# EAGLE board Verteilerplatine_Universal_LoetJumper_3x_Ohne_Trennung (EAGLE 9.2.2)
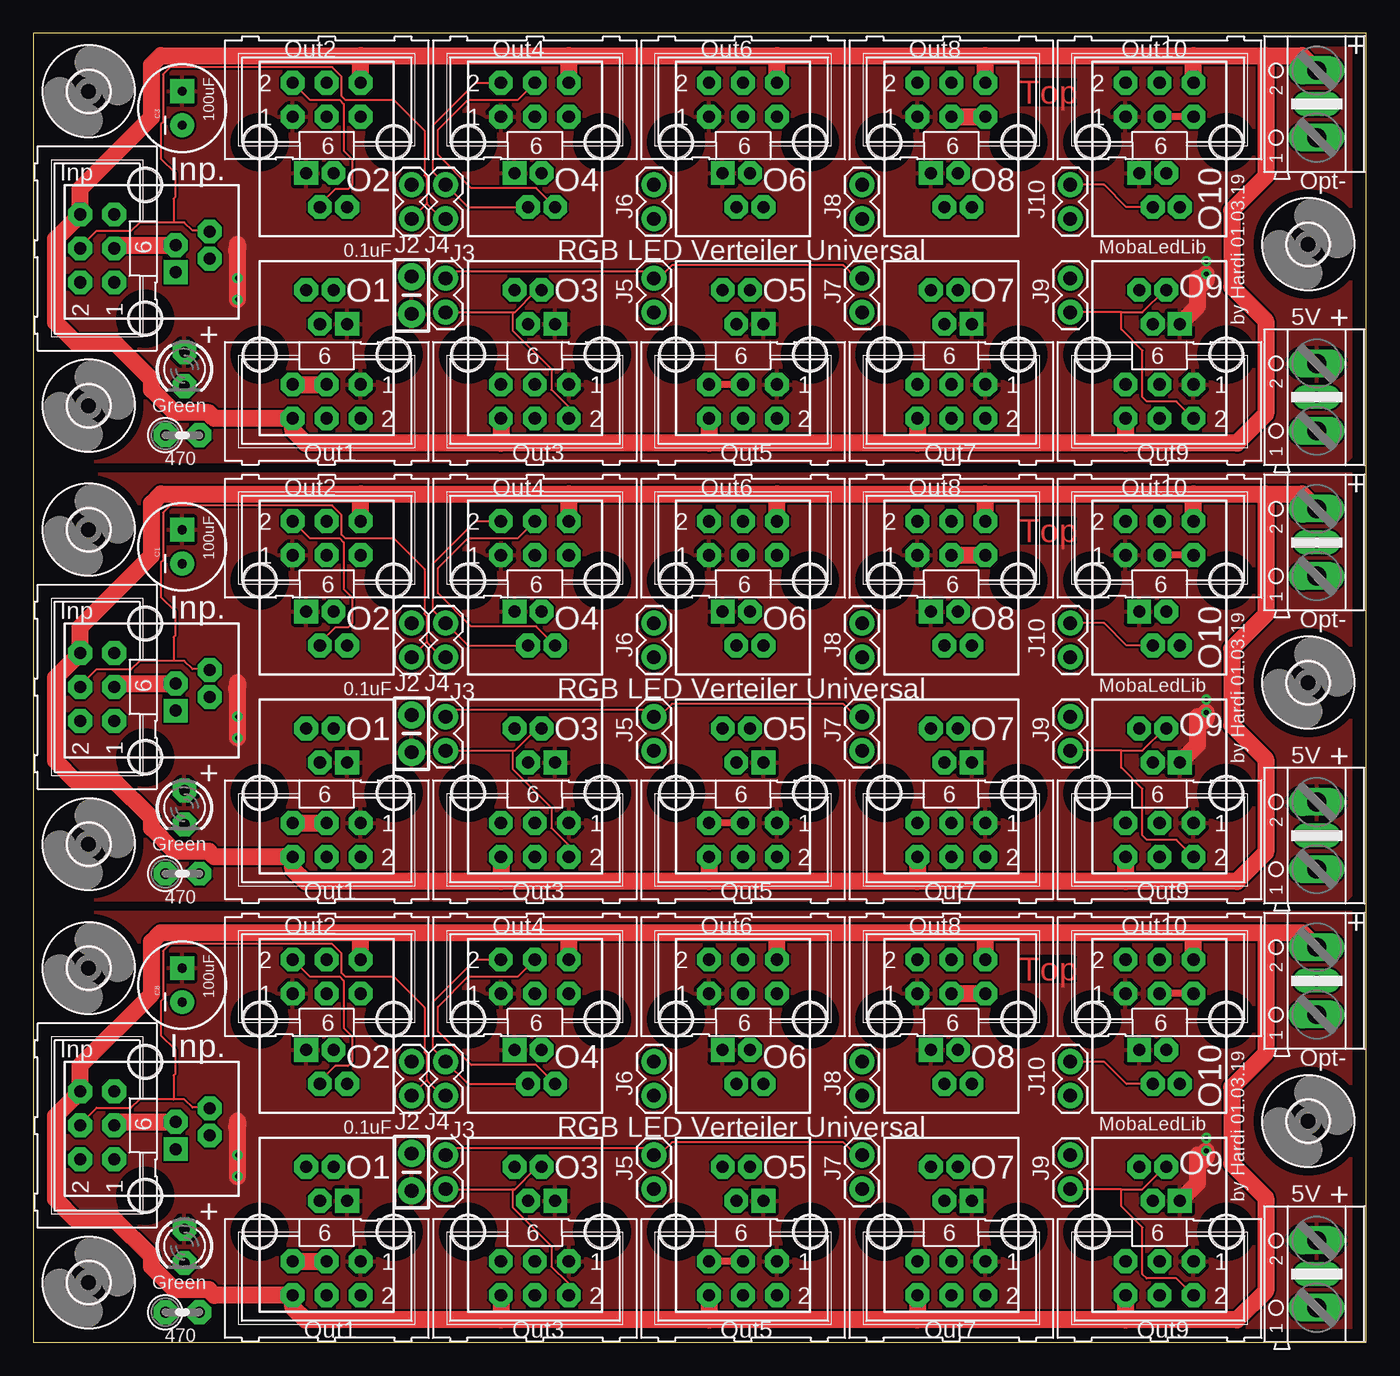
[diagram p0: board, top side]
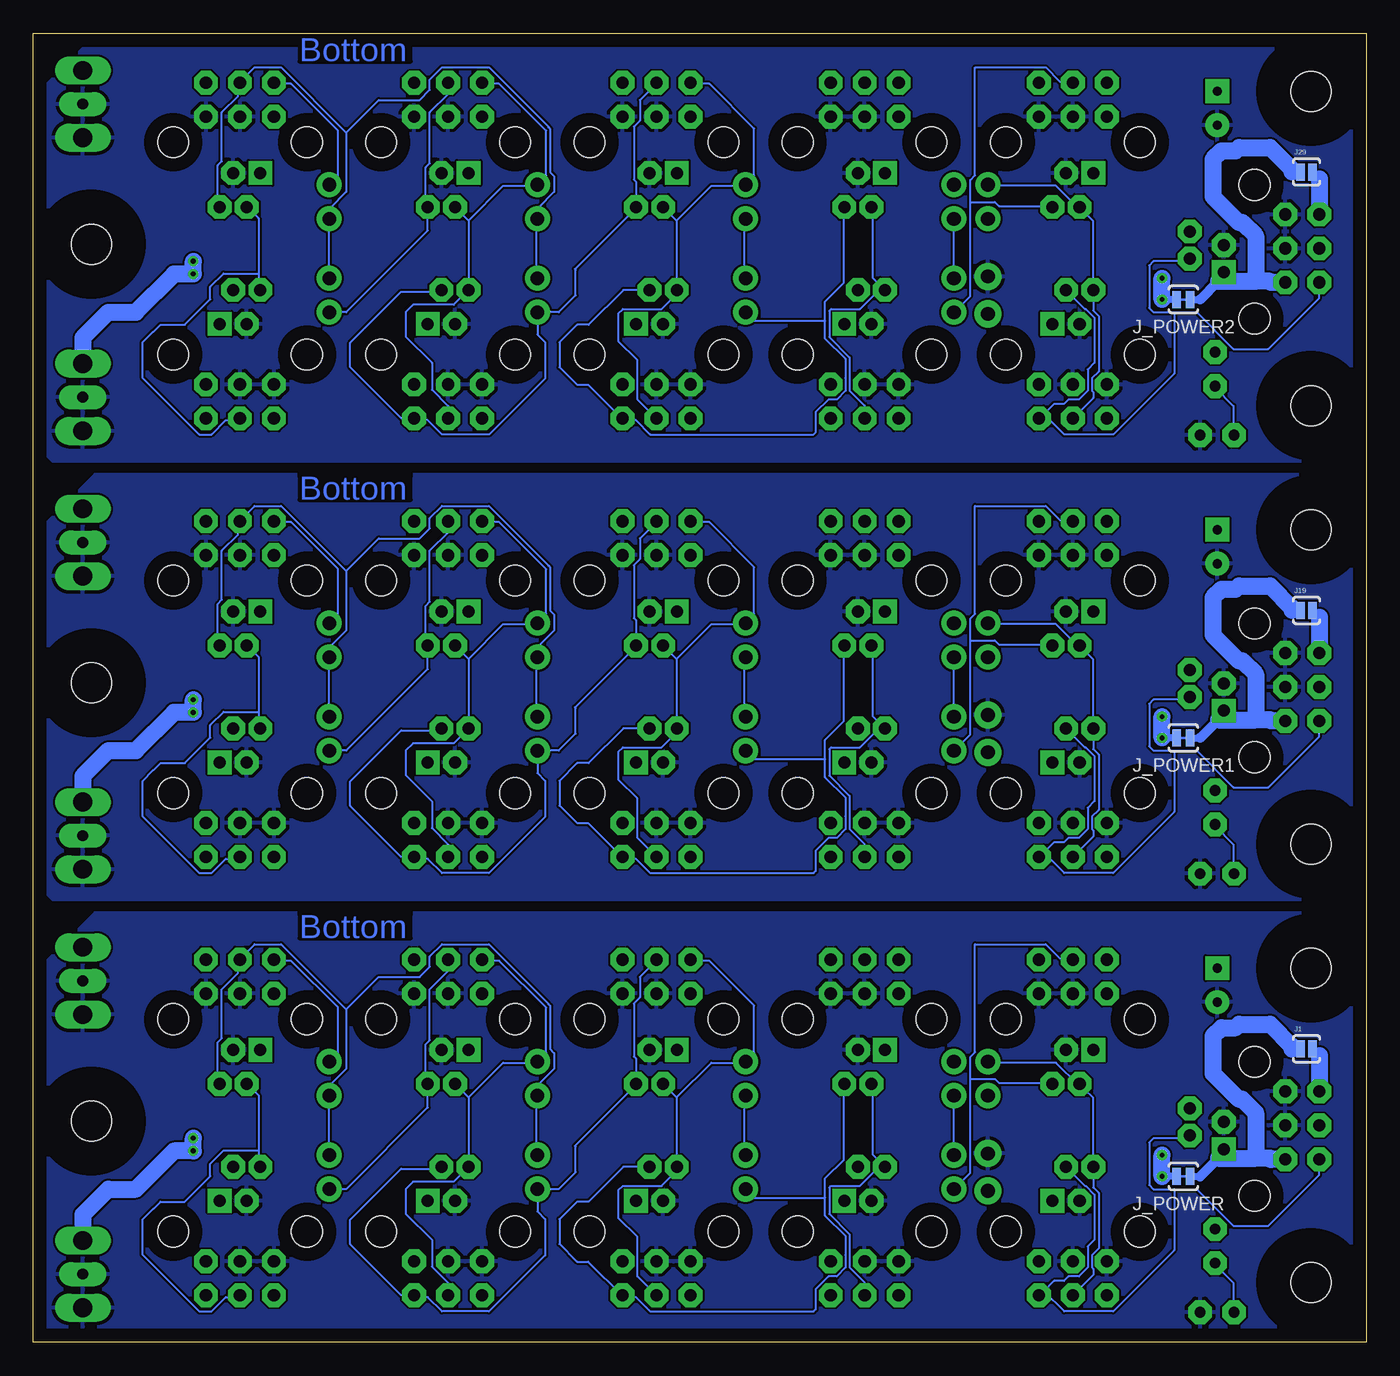
[diagram p1: board, bottom side, seen from below]

Size 99.57 x 97.78 mm. Coordinates in mm from the lower left corner, seen from the top.
Outline: 0,0 99.57,0 99.57,32.76 99.57,97.78 0,97.78 0,0
Copper layers (1*16): Top 0.035mm / dielectric 1.5mm / Bottom 0.035mm
Design rules "default": minimum track width 6mil, minimum drill 0.35mm, track to track 6mil, track to pad 6mil, pad to pad 6mil, via to via 6mil, smd to smd 6mil, copper to edge 40mil, drill to drill 6mil, minimum pad ring 10mil, minimum via ring 8mil, stop-mask expansion 4mil, vias tented up to drill 0mil, thermal gap 10mil

## Footprints (pad centres in the part's own frame; a part is rotated, then mirrored left to right if it is on the bottom)
SPARKFUN-CAPACITORS_CPOL-RADIAL-100UF-25V = drill 0.7 pad 1.778 square: 1 1.27,0 | drill 0.7 pad 1.778: 2 -1.27,0
CAP-PTH-SMALL-KIT = drill 1.016 pad 2.032: 1 -1.397,0; 2 1.397,0
3,0 = hole 3: 0,0
ML6 = drill 0.914 pad 1.778 octagon: 1 -2.54,-1.27; 2 -2.54,1.27; 3 0,-1.27; 4 0,1.27; 5 2.54,-1.27; 6 2.54,1.27
RJ10 = drill 0.9 pad 1.778 square: 1 -1.524,-2.3 | drill 0.9 pad 1.778 octagon: 2 -0.508,-4.84; 3 0.508,-2.3; 4 1.524,-4.84 | hole 2.3: 5,0; -5,0
SJ_2S-NO = smd 0.635 x 1.27: 1 -0.45,0; 2 0.45,0
1X02 = drill 1.016 pad 1.88: 1 0,0; 2 2.54,0
SJ_2S-TRACE = smd 0.635 x 1.27: 1 -0.508,0; 2 0.508,0
LED_LED3MM = drill 0.813 pad 1.778 octagon: A -1.27,0; K 1.27,0
RCL_0207/2V = drill 0.813 pad 1.778 octagon: 1 -1.27,0; 2 1.27,0
AK500/2+M = drill 1.397 long: 1 -2.515,0; 2 2.515,0 | drill 0.813 pad 1.778 long: M 0,0

## Placement (x,y rotation side)
C1  100uF  [SPARKFUN-CAPACITORS_CPOL-RADIAL-100UF-25V]  11.11,59.43 90 top
C2  0.1uF  [CAP-PTH-SMALL-KIT]  28.26,45.46 270 top
C3  100uF  [SPARKFUN-CAPACITORS_CPOL-RADIAL-100UF-25V]  11.11,92.19 90 top
C4  0.1uF  [CAP-PTH-SMALL-KIT]  28.26,78.22 270 top
C8  100uF  [SPARKFUN-CAPACITORS_CPOL-RADIAL-100UF-25V]  11.11,26.67 90 top
C9  0.1uF  [CAP-PTH-SMALL-KIT]  28.26,12.7 270 top
H1  MOUNT-HOLE3.0  [3,0]  4.13,60.7 0 top
H2  MOUNT-HOLE3.0  [3,0]  4.13,37.21 0 top
H3  MOUNT-HOLE3.0  [3,0]  95.25,49.27 0 top
H4  MOUNT-HOLE3.0  [3,0]  4.13,93.46 0 top
H5  MOUNT-HOLE3.0  [3,0]  4.13,27.94 0 top
H6  MOUNT-HOLE3.0  [3,0]  4.13,4.45 0 top
H7  MOUNT-HOLE3.0  [3,0]  4.13,69.96 0 top
H8  MOUNT-HOLE3.0  [3,0]  95.25,16.51 0 top
H9  MOUNT-HOLE3.0  [3,0]  95.25,82.03 0 top
INP1  [ML6]  4.76,48.95 90 top
INP2  [ML6]  4.76,81.71 90 top
INP6  [ML6]  4.76,16.19 90 top
INP_  RJ10  [RJ10]  8.33,15.94 90 top
INP_1  RJ10  [RJ10]  8.33,48.7 90 top
INP_2  RJ10  [RJ10]  8.33,81.46 90 top
J1  SOLDERJUMPERNO  [SJ_2S-NO]  4.44,21.91 0 bottom
J2  SIG  [1X02]  28.26,18.41 90 top
J3  SIG  [1X02]  30.8,13.97 270 top
J4  SIG  [1X02]  30.8,18.41 90 top
J5  SIG  [1X02]  46.36,13.97 270 top
J6  SIG  [1X02]  46.36,18.41 90 top
J7  SIG  [1X02]  61.91,13.97 270 top
J8  SIG  [1X02]  61.91,18.41 90 top
J9  SIG  [1X02]  77.47,13.97 270 top
J10  SIG  [1X02]  77.47,18.41 90 top
J11  SIG  [1X02]  77.47,51.18 90 top
J12  SIG  [1X02]  30.8,46.73 270 top
J13  SIG  [1X02]  30.8,51.18 90 top
J14  SIG  [1X02]  46.36,46.73 270 top
J15  SIG  [1X02]  46.36,51.18 90 top
J16  SIG  [1X02]  61.91,46.73 270 top
J17  SIG  [1X02]  61.91,51.18 90 top
J18  SIG  [1X02]  77.47,46.73 270 top
J19  SOLDERJUMPERNO  [SJ_2S-NO]  4.44,54.67 0 bottom
J20  SIG  [1X02]  28.26,51.18 90 top
J21  SIG  [1X02]  77.47,83.94 90 top
J22  SIG  [1X02]  30.8,79.49 270 top
J23  SIG  [1X02]  30.8,83.94 90 top
J24  SIG  [1X02]  46.36,79.49 270 top
J25  SIG  [1X02]  46.36,83.94 90 top
J26  SIG  [1X02]  61.91,79.49 270 top
J27  SIG  [1X02]  61.91,83.94 90 top
J28  SIG  [1X02]  77.47,79.49 270 top
J29  SOLDERJUMPERNO  [SJ_2S-NO]  4.44,87.43 0 bottom
J30  SIG  [1X02]  28.26,83.94 90 top
J_POWER  SOLDERJUMPERTRACE  [SJ_2S-TRACE]  13.65,12.38 0 bottom
J_POWER1  SOLDERJUMPERTRACE  [SJ_2S-TRACE]  13.65,45.14 0 bottom
J_POWER2  SOLDERJUMPERTRACE  [SJ_2S-TRACE]  13.65,77.9 0 bottom
LED  Green  [LED_LED3MM]  11.28,7.18 270 top
LED1  Green  [LED_LED3MM]  11.28,39.94 270 top
LED2  Green  [LED_LED3MM]  11.28,72.7 270 top
O1  [ML6]  21.91,4.76 180 top
O2  [ML6]  21.91,27.3 0 top
O3  [ML6]  37.47,4.76 180 top
O4  [ML6]  37.47,27.3 0 top
O5  [ML6]  53.02,4.76 180 top
O6  [ML6]  53.02,27.3 0 top
O7  [ML6]  68.58,4.76 180 top
O8  [ML6]  68.58,27.3 0 top
O9  [ML6]  84.14,4.76 180 top
O10  [ML6]  84.14,27.3 0 top
O11  [ML6]  21.91,60.07 0 top
O12  [ML6]  21.91,37.52 180 top
O13  [ML6]  37.47,37.52 180 top
O14  [ML6]  37.47,60.07 0 top
O15  [ML6]  53.02,37.52 180 top
O16  [ML6]  53.02,60.07 0 top
O17  [ML6]  68.58,37.52 180 top
O18  [ML6]  68.58,60.07 0 top
O19  [ML6]  84.14,37.52 180 top
O20  [ML6]  84.14,60.07 0 top
O21  [ML6]  21.91,92.82 0 top
O22  [ML6]  21.91,70.28 180 top
O23  [ML6]  37.47,70.28 180 top
O24  [ML6]  37.47,92.82 0 top
O25  [ML6]  53.02,70.28 180 top
O26  [ML6]  53.02,92.82 0 top
O27  [ML6]  68.58,70.28 180 top
O28  [ML6]  68.58,92.82 0 top
O29  [ML6]  84.14,70.28 180 top
O30  [ML6]  84.14,92.82 0 top
OUT1  RJ10  [RJ10]  21.91,8.26 180 top
OUT2  RJ10  [RJ10]  21.91,24.13 0 top
OUT3  RJ10  [RJ10]  37.47,8.26 180 top
OUT4  RJ10  [RJ10]  37.47,24.13 0 top
OUT5  RJ10  [RJ10]  53.02,8.26 180 top
OUT6  RJ10  [RJ10]  53.02,24.13 0 top
OUT7  RJ10  [RJ10]  68.58,8.26 180 top
OUT8  RJ10  [RJ10]  68.58,24.13 0 top
OUT9  RJ10  [RJ10]  84.14,8.26 180 top
OUT10  RJ10  [RJ10]  84.14,24.13 0 top
OUT11  RJ10  [RJ10]  21.91,41.02 180 top
OUT12  RJ10  [RJ10]  84.14,56.89 0 top
OUT13  RJ10  [RJ10]  21.91,56.89 0 top
OUT14  RJ10  [RJ10]  37.47,41.02 180 top
OUT15  RJ10  [RJ10]  37.47,56.89 0 top
OUT16  RJ10  [RJ10]  53.02,41.02 180 top
OUT17  RJ10  [RJ10]  53.02,56.89 0 top
OUT18  RJ10  [RJ10]  68.58,41.02 180 top
OUT19  RJ10  [RJ10]  68.58,56.89 0 top
OUT20  RJ10  [RJ10]  84.14,41.02 180 top
OUT21  RJ10  [RJ10]  21.91,73.77 180 top
OUT22  RJ10  [RJ10]  84.14,89.65 0 top
OUT23  RJ10  [RJ10]  21.91,89.65 0 top
OUT24  RJ10  [RJ10]  37.47,73.77 180 top
OUT25  RJ10  [RJ10]  37.47,89.65 0 top
OUT26  RJ10  [RJ10]  53.02,73.77 180 top
OUT27  RJ10  [RJ10]  53.02,89.65 0 top
OUT28  RJ10  [RJ10]  68.58,73.77 180 top
OUT29  RJ10  [RJ10]  68.58,89.65 0 top
OUT30  RJ10  [RJ10]  84.14,73.77 180 top
R1  470  [RCL_0207/2V]  11.13,35 0 top
R2  470  [RCL_0207/2V]  11.13,67.76 0 top
R21  470  [RCL_0207/2V]  11.13,2.24 0 top
X1  AK500/2+M  [AK500/2+M]  95.89,26.99 90 top
X2  AK500/2+M  [AK500/2+M]  95.89,5.08 90 top
X3  AK500/2+M  [AK500/2+M]  95.89,37.84 90 top
X4  AK500/2+M  [AK500/2+M]  95.89,59.75 90 top
X5  AK500/2+M  [AK500/2+M]  95.89,70.6 90 top
X6  AK500/2+M  [AK500/2+M]  95.89,92.51 90 top

## Library data of the parts
C1 C3 C8 = Sound_MP3-TF-16P_and_WS2811; PROD_ID: CAP-08439
C2 C4 C9 = SparkFun-Capacitors; PROD_ID: CAP-08370
H1-H9 = holes
INP1 INP2 INP6 O1-O30 = con-harting-ml; OC_FARNELL: unknown; OC_NEWARK: unknown
INP_ INP_1 INP_2 OUT1-OUT30 = RJ10; OC_FARNELL: unknown; OC_NEWARK: unknown
J1 J19 J29 J_POWER J_POWER1 J_POWER2 = SparkFun-Retired
J2-J18 J20-J28 J30 = SparkFun-Connectors
LED LED1 LED2 = Sound_MP3-TF-16P_and_WS2811
R1 R2 R21 = Sound_MP3-TF-16P_and_WS2811; SPICEPREFIX: R
X1-X6 = Arduino_fuer_LEDs_DCC_2

## Nets
5V: C8.1 C9.2 J_POWER.1 LED.A O1.1 O2.1 O3.1 O4.1 O5.1 O6.1 O7.1 O8.1 O9.1 O10.1 OUT1.1 OUT2.1 OUT3.1 OUT4.1 OUT5.1 OUT6.1 OUT7.1 OUT8.1 OUT9.1 OUT10.1 X2.2
5V1: C1.1 C2.2 J_POWER1.1 LED1.A O11.1 O12.1 O13.1 O14.1 O15.1 O16.1 O17.1 O18.1 O19.1 O20.1 OUT11.1 OUT12.1 OUT13.1 OUT14.1 OUT15.1 OUT16.1 OUT17.1 OUT18.1 OUT19.1 OUT20.1 X3.2
5V2: C3.1 C4.2 J_POWER2.1 LED2.A O21.1 O22.1 O23.1 O24.1 O25.1 O26.1 O27.1 O28.1 O29.1 O30.1 OUT21.1 OUT22.1 OUT23.1 OUT24.1 OUT25.1 OUT26.1 OUT27.1 OUT28.1 OUT29.1 OUT30.1 X5.2
GND: C8.2 C9.1 INP6.3 INP6.5 INP_.3 O1.3 O1.5 O2.3 O2.5 O3.3 O3.5 O4.3 O4.5 O5.3 O5.5 O6.3 O6.5 O7.3 O7.5 O8.3 O8.5 O9.3 O9.5 O10.3 O10.5 OUT1.3 OUT2.3 OUT3.3 OUT4.3 OUT5.3 OUT6.3 OUT7.3 OUT8.3 OUT9.3 OUT10.3 R21.2 X1.1 X1.M X2.1 X2.M
GND1: C1.2 C2.1 INP1.3 INP1.5 INP_1.3 O11.3 O11.5 O12.3 O12.5 O13.3 O13.5 O14.3 O14.5 O15.3 O15.5 O16.3 O16.5 O17.3 O17.5 O18.3 O18.5 O19.3 O19.5 O20.3 O20.5 OUT11.3 OUT12.3 OUT13.3 OUT14.3 OUT15.3 OUT16.3 OUT17.3 OUT18.3 OUT19.3 OUT20.3 R1.2 X3.1 X3.M X4.1 X4.M
GND2: C3.2 C4.1 INP2.3 INP2.5 INP_2.3 O21.3 O21.5 O22.3 O22.5 O23.3 O23.5 O24.3 O24.5 O25.3 O25.5 O26.3 O26.5 O27.3 O27.5 O28.3 O28.5 O29.3 O29.5 O30.3 O30.5 OUT21.3 OUT22.3 OUT23.3 OUT24.3 OUT25.3 OUT26.3 OUT27.3 OUT28.3 OUT29.3 OUT30.3 R2.2 X5.1 X5.M X6.1 X6.M
N$1: J10.2 O9.4 O10.2 OUT9.4 OUT10.2
N$2: J7.2 O6.4 O7.2 OUT6.4 OUT7.2
N$3: INP6.2 INP_.2 O1.2 OUT1.2
N$4: J8.2 O7.4 O8.2 OUT7.4 OUT8.2
N$5: J13.2 O13.4 O14.2 OUT14.4 OUT15.2
N$6: J14.2 O14.4 O15.2 OUT15.4 OUT16.2
N$7: INP6.1 INP_.1 J1.1 J_POWER.2
N$8: J2.2 O1.4 O2.2 OUT1.4 OUT2.2
N$9: J15.2 O15.4 O16.2 OUT16.4 OUT17.2
N$10: INP1.4 INP_1.4 J11.1 J12.1 J13.1 J14.1 J15.1 J16.1 J17.1 J18.1 J20.1 O20.4 OUT12.4
N$11: J3.2 O2.4 O3.2 OUT2.4 OUT3.2
N$12: J18.2 O18.4 O19.2 OUT19.4 OUT20.2
N$13: LED1.K R1.1
N$14: J11.2 O19.4 O20.2 OUT12.2 OUT20.4
N$15: INP1.1 INP_1.1 J19.1 J_POWER1.2
N$16: LED.K R21.1
N$17: J20.2 O11.2 O12.4 OUT11.4 OUT13.2
N$18: J16.2 O16.4 O17.2 OUT17.4 OUT18.2
N$19: J17.2 O17.4 O18.2 OUT18.4 OUT19.2
N$20: INP1.2 INP_1.2 O12.2 OUT11.2
N$21: J12.2 O11.4 O13.2 OUT13.4 OUT14.2
N$22: J23.2 O23.4 O24.2 OUT24.4 OUT25.2
N$23: J24.2 O24.4 O25.2 OUT25.4 OUT26.2
N$24: J25.2 O25.4 O26.2 OUT26.4 OUT27.2
N$25: INP2.4 INP_2.4 J21.1 J22.1 J23.1 J24.1 J25.1 J26.1 J27.1 J28.1 J30.1 O30.4 OUT22.4
N$26: J28.2 O28.4 O29.2 OUT29.4 OUT30.2
N$27: LED2.K R2.1
N$28: J21.2 O29.4 O30.2 OUT22.2 OUT30.4
N$29: INP2.1 INP_2.1 J29.1 J_POWER2.2
N$30: J30.2 O21.2 O22.4 OUT21.4 OUT23.2
N$31: J26.2 O26.4 O27.2 OUT27.4 OUT28.2
N$32: J27.2 O27.4 O28.2 OUT28.4 OUT29.2
N$33: INP2.2 INP_2.2 O22.2 OUT21.2
N$34: J22.2 O21.4 O23.2 OUT23.4 OUT24.2
N$47: J4.2 O3.4 O4.2 OUT3.4 OUT4.2
N$50: J5.2 O4.4 O5.2 OUT4.4 OUT5.2
N$51: J6.2 O5.4 O6.2 OUT5.4 OUT6.2
N$56: INP6.4 INP_.4 J2.1 J3.1 J4.1 J5.1 J6.1 J7.1 J8.1 J9.1 J10.1 O10.4 OUT10.4
N$57: J9.2 O8.4 O9.2 OUT8.4 OUT9.2
POWER1: INP1.6 J19.2 O11.6 O12.6 O13.6 O14.6 O15.6 O16.6 O17.6 O18.6 O19.6 O20.6 X4.2
POWER2: INP6.6 J1.2 O1.6 O2.6 O3.6 O4.6 O5.6 O6.6 O7.6 O8.6 O9.6 O10.6 X1.2
POWER3: INP2.6 J29.2 O21.6 O22.6 O23.6 O24.6 O25.6 O26.6 O27.6 O28.6 O29.6 O30.6 X6.2

## Tracks (layer width: path | path; a pad name or v marks a point on that pad's centre or on a via)
5V  (via drill 0.35)
  Top 1.27: OUT9.1 87,11.89 87,13.97 87.39,13.57 87.63,13.81 v87.63,14.29 | v15.24,12.38 v15.24,13.97 15.24,16.12 | 15.24,16.51 15.24,16.12 | 15.24,16.12 15.17,16.05
  Bottom 0.508: J_POWER.1 v15.24,12.38
  Bottom 1.27: X2.2 95.89,9.52 93.98,11.43 91.92,11.43 89.06,14.29 v87.63,14.29 v87.63,15.24 | v15.24,12.38 v15.24,13.97
  pour Top: 3.49,0.32 98.11,0.32 99.38,1.59 99.38,31.43 98.74,32.07 0,32.07 0,3.81
5V1  (via drill 0.35)
  Top 1.27: OUT20.1 87,44.65 87,46.73 87.39,46.33 87.63,46.57 v87.63,47.05 | v15.24,45.14 v15.24,46.73 15.24,48.88 | 15.24,49.27 15.24,48.88 | 15.24,48.88 15.17,48.81
  Bottom 0.508: J_POWER1.1 v15.24,45.14
  Bottom 1.27: X3.2 95.89,42.29 93.98,44.19 91.92,44.19 89.06,47.05 v87.63,47.05 v87.63,48 | v15.24,45.14 v15.24,46.73
  pour Top: 3.49,33.08 98.11,33.08 99.38,34.35 99.38,64.19 98.74,64.83 0,64.83 0,36.57
5V2  (via drill 0.35)
  Top 1.27: OUT30.1 87,77.41 87,79.49 87.39,79.09 87.63,79.33 v87.63,79.81 | v15.24,77.9 v15.24,79.49 15.24,81.64 | 15.24,82.03 15.24,81.64 | 15.24,81.64 15.17,81.57
  Bottom 0.508: J_POWER2.1 v15.24,77.9
  Bottom 1.27: X5.2 95.89,75.05 93.98,76.95 91.92,76.95 89.06,79.81 v87.63,79.81 v87.63,80.76 | v15.24,77.9 v15.24,79.49
  pour Top: 3.49,65.84 98.11,65.84 99.38,67.11 99.38,96.95 98.74,97.59 0,97.59 0,69.33
GND
  Top 0.508: O10.5 O10.3 | INP6.3 6.29,16.45 | O5.3 O5.5
  Top 1.27: O1.5 O1.3 | O8.3 O8.5 | 6.29,16.45 INP_.3
  pour Bottom: 2.22,0.32 98.11,0.32 99.38,1.59 99.38,27.62 94.93,32.07 2.22,32.07 0,29.85 0,2.54
GND1
  Top 0.508: O20.5 O20.3 | INP1.3 6.29,49.21 | O15.3 O15.5
  Top 1.27: O12.5 O12.3 | O18.3 O18.5 | 6.29,49.21 INP_1.3
  pour Bottom: 2.22,33.08 98.11,33.08 99.38,34.35 99.38,60.38 94.93,64.83 2.22,64.83 0,62.6 0,35.3
GND2
  Top 0.508: O30.5 O30.3 | INP2.3 6.29,81.97 | O25.3 O25.5
  Top 1.27: O22.5 O22.3 | O28.3 O28.5 | 6.29,81.97 INP_2.3
  pour Bottom: 2.22,65.84 98.11,65.84 99.38,67.11 99.38,93.14 94.93,97.59 2.22,97.59 0,95.36 0,68.06
N$1
  Top 0.152: OUT10.2 81.68,19.29 80.01,20.96 J10.2
  Bottom 0.152: O10.2 81.53,28.5 80.32,28.5 76.81,24.99 76.81,21.62 J10.2 | 82.75,14.33 82.75,18.44 83.52,19.2 OUT10.2 | 82.75,14.33 82.75,13.11 OUT9.4 | O9.4 84.28,3.35 85.19,3.35 86.26,2.29 87.17,2.29 91.44,6.55 91.44,9.14 90.61,9.97 90.59,9.97 90.07,10.5 88.27,10.5 86.36,12.4 86.36,13.33 85.37,14.33 82.75,14.33
N$2
  Bottom 0.152: OUT7.2 69.19,12.95 72.09,12.95 75.9,9.14 75.9,7.32 72.09,3.51 71.17,3.51 O7.2 71.02,3.35 70.1,3.35 69.04,2.29 65.53,2.29 61.34,6.48 61.34,9.18 61.91,9.76 J7.2 60.33,11.43 59.06,12.7 59.06,14.61 59.11,14.66 54.56,19.2 OUT6.4 54.56,19.35 54.56,21.18 54.71,21.34 54.71,25.3 54.25,25.76 54.25,27.28 53.04,28.5 O6.4
N$3
  Bottom 0.152: 24.08,3.81 24.38,3.51 O1.2 24.08,3.81 | 24.08,3.81 23.32,4.57 22.57,4.57 22.23,4.91 21.44,4.91 20.79,5.57 20.79,7.15 20.28,7.66 20.28,11.02 20.94,11.67 20.99,11.67 OUT1.2 | 14.33,11.43 12.65,11.43 9.91,8.69 7.32,8.69 3.51,12.5 3.51,13.56 INP6.2 | 24.08,3.81 22.56,2.29 18.9,2.29 14.33,6.86 14.33,11.43 | INP_.2 13.36,15.24 15.88,15.24 16.19,14.92 16.19,11.75 15.88,11.43 14.33,11.43
N$4
  Bottom 0.152: O8.2 65.99,28.5 64.77,28.5 61.27,24.99 61.27,21.64 61.87,21.03 J8.2 62.03,20.88 64.47,20.88 67.06,18.29 | 67.06,18.29 OUT7.4 68.17,11.98 71.21,11.98 71.76,11.43 71.76,9.6 69.8,7.65 69.8,5.64 68.58,4.42 O7.4 | 67.06,18.29 67.97,19.2 OUT8.2
N$5
  Top 0.152: O14.2 33.02,61.33 29.85,58.16 29.85,54.67 J13.2 32.46,52.05 OUT15.2
  Bottom 0.152: OUT15.2 36.88,51.96 36.88,46.78 36.87,46.78 OUT14.4 35.94,45.84 36.41,45.84 37.82,44.43 39.97,44.43 40.11,44.3 40.11,42.33 38.58,40.81 38.58,38.33 37.47,37.21 O13.4
N$6
  Top 0.152: OUT15.4 37.57,53.47 32.71,53.47 30.22,55.96 30.22,57.82 32.47,60.07 36.2,60.07 O14.4
  Bottom 0.152: OUT15.4 39.01,51.96 39.01,46.39 40.41,45 40.41,43.55 | 55.51,36.17 55.47,36.11 54.56,36.11 53.49,35.05 41.28,35.05 41.12,35.2 41.12,36.72 40.16,37.67 39.54,37.67 38.89,38.33 38.89,39.26 38.91,39.28 38.91,40.71 40.41,42.21 40.41,43.55 | 55.51,36.17 O15.2 | OUT16.2 55.49,45.86 58.08,43.26 58.95,43.26 60.26,41.94 60.26,40.09 58.95,38.77 58.11,38.77 55.51,36.17 | J14.2 45.72,43.55 40.41,43.55
N$7
  Bottom 0.508: 10.8,13.65 10.63,13.81 | J1.1 5.53,21.91 | J_POWER.2 12.38,12.38
  Bottom 0.762: 12.38,12.38 11.03,13.74 10.88,13.74 10.8,13.65
  Bottom 1.27: INP6.1 7.09,13.65 7.17,13.74 8.26,13.74 | 11.03,13.74 8.26,13.74 | 8.26,13.74 8.26,17.15 9.25,18.14 9.49,18.14 11.43,20.07 11.43,22.86 10.8,23.5 9.74,23.5 9.49,23.74 7.17,23.74 5.53,22.1 5.53,21.91 | INP_.1 10.63,13.81
N$8
  Top 0.152: O2.2 20.64,27.3 22.86,27.3 23.18,26.99 23.18,23.5 23.81,22.86 23.81,20.96 23.5,20.64 22.54,20.64 21.4,19.49 OUT2.2
  Bottom 0.152: 21.03,18.9 21.34,19.2 OUT2.2 | 21.03,18.9 20.42,18.29 20.42,13.11 OUT1.4 20.38,11.55 19.98,11.14 19.98,7 20.49,6.5 20.49,5.57 20.38,5.47 20.38,5.02 O1.4 | 21.03,18.9 OUT2.2 | J2.2 28.19,20.88 23.17,20.88 21.49,19.2 OUT2.2
N$9
  Bottom 0.152: O16.2 50.44,61.26 49.07,61.26 45.72,57.91 45.72,54.4 46.33,53.79 J15.2 46.48,53.64 48.92,53.64 51.51,51.05 | 51.51,51.05 51.51,45.87 OUT16.4 51.36,45.71 52.64,44.43 55.53,44.43 55.88,44.08 55.88,42.04 54.45,40.61 54.45,37.67 O15.4 | 51.51,51.05 52.43,51.96 OUT17.2
N$10
  Top 0.152: 10.48,50.9 11.28,50.9 11.89,50.29 13.11,50.29 INP_1.4 | 10.48,50.9 7.93,50.9 7.28,50.25 7.25,50.27 4.71,50.27 3.51,49.07 INP1.4 | J16.1 61.87,46.78 61.42,46.78 60.5,47.7 47.7,47.7 46.79,46.78 46.48,46.78 J14.1 46.33,46.78 45.87,47.24 30.79,47.24 | J20.1 29.38,52.3 | 29.38,52.3 29.43,52.34 29.43,54.2 29.21,54.41 29.21,57.76 26.9,60.07 23.29,60.07 23.03,60.33 23.03,61.8 22.32,62.5 10.22,62.5 9.69,61.97 9.69,58.4 9.53,58.23 9.53,55.68 10.57,54.63 10.57,52.77 10.48,52.67 10.48,50.9 | 30.79,47.24 30.79,46.78 J12.1 30.79,47.24 | 29.38,52.3 30.48,51.2 30.79,51.2 J13.1
  Bottom 0.152: J14.1 46.48,46.78 46.48,51.05 J15.1 | J16.1 62.03,46.78 62.03,51.05 J17.1 61.87,51.2 61.87,51.96 60.66,53.18 60.66,54.35 60.96,54.65 60.96,57.88 61.09,58.01 61.09,58.03 65.53,62.48 69.04,62.48 69.95,61.56 69.95,60.8 70.71,60.04 73.76,60.04 76.2,57.6 | OUT12.4 85.8,52.11 85.8,55.16 85.5,55.47 85.5,59.13 84.28,60.34 84.28,61.26 O20.4 84.13,61.41 83.06,62.48 81.08,62.48 76.2,57.6 | 76.2,57.6 76.2,53.18 77.42,51.96 77.42,51.23 J11.1 J18.1 | J12.1 J13.1
N$11
  Top 0.152: J3.2 35.81,11.43 | 35.81,11.43 35.97,11.43 37.49,12.95 37.95,12.95 OUT3.2 | 35.81,11.43 35.81,10.06 38.71,7.16 38.71,5.64 39.93,4.42 39.93,3.51 O3.2
  Bottom 0.152: O2.4 21.95,28.65 22.86,28.65 23.93,29.72 29.21,29.72 29.21,21.65 29.57,21.3 29.57,19.66 | 29.57,19.66 27.74,19.66 27.43,19.35 23.47,19.35 OUT2.4 | 29.57,19.66 29.57,12.65 30.79,11.43 J3.2
N$12
  Top 0.152: O19.2 85.41,37.52 83.19,37.52 82.87,37.84 82.87,41.33 81.28,42.92 81.28,44.19 | 81.28,44.19 J18.2 | OUT20.2 84.53,45.86 82.87,44.19 81.28,44.19
  Bottom 0.152: O18.4 68.58,60.5 69.95,59.13 69.95,55.32 70.26,55.01 70.26,52.27 70.1,52.11 OUT19.4 70.1,50.29 76.2,44.19 J18.2
N$13
  Bottom 0.152: R1.1 9.91,35.05 9.91,37.18 11.28,38.55 LED1.K
N$14
  Top 0.152: OUT12.2 81.68,52.05 80.01,53.71 J11.2
  Bottom 0.152: O20.2 81.53,61.26 80.32,61.26 76.81,57.75 76.81,54.38 J11.2 | 82.75,47.09 82.75,51.2 83.52,51.96 OUT12.2 | 82.75,47.09 82.75,45.87 OUT20.4 | O19.4 84.28,36.11 85.19,36.11 86.26,35.05 87.17,35.05 91.44,39.31 91.44,41.9 90.61,42.73 90.59,42.73 90.07,43.26 88.27,43.26 86.36,45.16 86.36,46.1 85.37,47.09 82.75,47.09
N$15
  Bottom 0.508: 10.8,46.41 10.63,46.58 | J19.1 5.53,54.67 | J_POWER1.2 12.38,45.14
  Bottom 0.762: 12.38,45.14 11.03,46.5 10.88,46.5 10.8,46.41
  Bottom 1.27: INP1.1 7.09,46.41 7.17,46.5 8.26,46.5 | 11.03,46.5 8.26,46.5 | 8.26,46.5 8.26,49.9 9.25,50.9 9.49,50.9 11.43,52.83 11.43,55.62 10.8,56.26 9.74,56.26 9.49,56.5 7.17,56.5 5.53,54.86 5.53,54.67 | INP_1.1 10.63,46.58
N$16
  Bottom 0.152: R21.1 9.91,2.29 9.91,4.42 11.28,5.79 LED.K
N$17
  Top 0.152: O11.2 20.64,60.07 22.86,60.07 23.18,59.75 23.18,56.26 23.81,55.62 23.81,53.71 23.5,53.4 22.54,53.4 21.4,52.25 OUT13.2
  Bottom 0.152: 21.03,51.66 21.34,51.96 OUT13.2 | 21.03,51.66 20.42,51.05 20.42,45.87 OUT11.4 20.38,44.31 19.98,43.9 19.98,39.76 20.49,39.26 20.49,38.33 20.38,38.23 20.38,37.78 O12.4 | 21.03,51.66 OUT13.2 | J20.2 28.19,53.64 23.17,53.64 21.49,51.96 OUT13.2
N$18
  Bottom 0.152: OUT18.2 69.19,45.71 72.09,45.71 75.9,41.9 75.9,40.08 72.09,36.27 71.17,36.27 O17.2 71.02,36.11 70.1,36.11 69.04,35.05 65.53,35.05 61.34,39.24 61.34,41.94 61.91,42.52 J16.2 60.33,44.19 59.06,45.46 59.06,47.36 59.11,47.42 54.56,51.96 OUT17.4 54.56,52.11 54.56,53.94 54.71,54.1 54.71,58.06 54.25,58.52 54.25,60.04 53.04,61.26 O16.4
N$19
  Bottom 0.152: O18.2 65.99,61.26 64.77,61.26 61.27,57.75 61.27,54.4 61.87,53.79 J17.2 62.03,53.64 64.47,53.64 67.06,51.05 | 67.06,51.05 OUT18.4 68.17,44.74 71.21,44.74 71.76,44.19 71.76,42.36 69.8,40.41 69.8,38.4 68.58,37.18 O17.4 | 67.06,51.05 67.97,51.96 OUT19.2
N$20
  Bottom 0.152: 24.08,36.57 24.38,36.27 O12.2 24.08,36.57 | 24.08,36.57 23.32,37.33 22.57,37.33 22.23,37.67 21.44,37.67 20.79,38.33 20.79,39.91 20.28,40.42 20.28,43.78 20.94,44.43 20.99,44.43 OUT11.2 | 14.33,44.19 12.65,44.19 9.91,41.45 7.32,41.45 3.51,45.26 3.51,46.32 INP1.2 | 24.08,36.57 22.56,35.05 18.9,35.05 14.33,39.62 14.33,44.19 | INP_1.2 13.36,48 15.88,48 16.19,47.68 16.19,44.51 15.88,44.19 14.33,44.19
N$21
  Top 0.152: J12.2 35.81,44.19 | 35.81,44.19 35.97,44.19 37.49,45.71 37.95,45.71 OUT14.2 | 35.81,44.19 35.81,42.82 38.71,39.92 38.71,38.4 39.93,37.18 39.93,36.27 O13.2
  Bottom 0.152: O11.4 21.95,61.41 22.86,61.41 23.93,62.48 29.21,62.48 29.21,54.41 29.57,54.06 29.57,52.42 | 29.57,52.42 27.74,52.42 27.43,52.11 23.47,52.11 OUT13.4 | 29.57,52.42 29.57,45.41 30.79,44.19 J12.2
N$22
  Top 0.152: O24.2 33.02,94.1 29.85,90.92 29.85,87.43 J23.2 32.46,84.81 OUT25.2
  Bottom 0.152: OUT25.2 36.88,84.72 36.88,79.54 36.87,79.54 OUT24.4 35.94,78.6 36.41,78.6 37.82,77.19 39.97,77.19 40.11,77.06 40.11,75.09 38.58,73.57 38.58,71.09 37.47,69.97 O23.4
N$23
  Top 0.152: OUT25.4 37.57,86.23 32.71,86.23 30.22,88.72 30.22,90.58 32.47,92.82 36.2,92.82 O24.4
  Bottom 0.152: OUT25.4 39.01,84.72 39.01,79.15 40.41,77.76 40.41,76.32 | 55.51,68.93 55.47,68.87 54.56,68.87 53.49,67.81 41.28,67.81 41.12,67.96 41.12,69.48 40.16,70.43 39.54,70.43 38.89,71.09 38.89,72.02 38.91,72.04 38.91,73.47 40.41,74.97 40.41,76.32 | 55.51,68.93 O25.2 | OUT26.2 55.49,78.61 58.08,76.02 58.95,76.02 60.26,74.7 60.26,72.85 58.95,71.53 58.11,71.53 55.51,68.93 | J24.2 45.72,76.32 40.41,76.32
N$24
  Bottom 0.152: O26.2 50.44,94.02 49.07,94.02 45.72,90.67 45.72,87.16 46.33,86.55 J25.2 46.48,86.4 48.92,86.4 51.51,83.81 | 51.51,83.81 51.51,78.63 OUT26.4 51.36,78.47 52.64,77.19 55.53,77.19 55.88,76.84 55.88,74.8 54.45,73.37 54.45,70.43 O25.4 | 51.51,83.81 52.43,84.72 OUT27.2
N$25
  Top 0.152: 10.48,83.66 11.28,83.66 11.89,83.05 13.11,83.05 INP_2.4 | 10.48,83.66 7.93,83.66 7.28,83.01 7.25,83.03 4.71,83.03 3.51,81.83 INP2.4 | J26.1 61.87,79.54 61.42,79.54 60.5,80.46 47.7,80.46 46.79,79.54 46.48,79.54 J24.1 46.33,79.54 45.87,80 30.79,80 | J30.1 29.38,85.06 | 29.38,85.06 29.43,85.1 29.43,86.96 29.21,87.17 29.21,90.52 26.9,92.82 23.29,92.82 23.03,93.09 23.03,94.56 22.32,95.26 10.22,95.26 9.69,94.73 9.69,91.16 9.53,90.99 9.53,88.44 10.57,87.39 10.57,85.53 10.48,85.43 10.48,83.66 | 30.79,80 30.79,79.54 J22.1 30.79,80 | 29.38,85.06 30.48,83.96 30.79,83.96 J23.1
  Bottom 0.152: J24.1 46.48,79.54 46.48,83.81 J25.1 | J26.1 62.03,79.54 62.03,83.81 J27.1 61.87,83.96 61.87,84.72 60.66,85.94 60.66,87.11 60.96,87.41 60.96,90.64 61.09,90.77 61.09,90.79 65.53,95.24 69.04,95.24 69.95,94.32 69.95,93.56 70.71,92.8 73.76,92.8 76.2,90.36 | OUT22.4 85.8,84.87 85.8,87.92 85.5,88.23 85.5,91.89 84.28,93.1 84.28,94.02 O30.4 84.13,94.17 83.06,95.24 81.08,95.24 76.2,90.36 | 76.2,90.36 76.2,85.94 77.42,84.72 77.42,83.99 J21.1 J28.1 | J22.1 J23.1
N$26
  Top 0.152: O29.2 85.41,70.28 83.19,70.28 82.87,70.6 82.87,74.09 81.28,75.68 81.28,76.95 | 81.28,76.95 J28.2 | OUT30.2 84.53,78.61 82.87,76.95 81.28,76.95
  Bottom 0.152: O28.4 68.58,93.26 69.95,91.89 69.95,88.08 70.26,87.77 70.26,85.03 70.1,84.87 OUT29.4 70.1,83.05 76.2,76.95 J28.2
N$27
  Bottom 0.152: R2.1 9.91,67.81 9.91,69.94 11.28,71.31 LED2.K
N$28
  Top 0.152: OUT22.2 81.68,84.81 80.01,86.47 J21.2
  Bottom 0.152: O30.2 81.53,94.02 80.32,94.02 76.81,90.51 76.81,87.14 J21.2 | 82.75,79.85 82.75,83.96 83.52,84.72 OUT22.2 | 82.75,79.85 82.75,78.63 OUT30.4 | O29.4 84.28,68.87 85.19,68.87 86.26,67.81 87.17,67.81 91.44,72.07 91.44,74.66 90.61,75.49 90.59,75.49 90.07,76.02 88.27,76.02 86.36,77.92 86.36,78.85 85.37,79.85 82.75,79.85
N$29
  Bottom 0.508: 10.8,79.17 10.63,79.33 | J29.1 5.53,87.43 | J_POWER2.2 12.38,77.9
  Bottom 0.762: 12.38,77.9 11.03,79.26 10.88,79.26 10.8,79.17
  Bottom 1.27: INP2.1 7.09,79.17 7.17,79.26 8.26,79.26 | 11.03,79.26 8.26,79.26 | 8.26,79.26 8.26,82.66 9.25,83.66 9.49,83.66 11.43,85.59 11.43,88.38 10.8,89.02 9.74,89.02 9.49,89.26 7.17,89.26 5.53,87.62 5.53,87.43 | INP_2.1 10.63,79.33
N$30
  Top 0.152: O21.2 20.64,92.82 22.86,92.82 23.18,92.51 23.18,89.02 23.81,88.38 23.81,86.47 23.5,86.16 22.54,86.16 21.4,85.01 OUT23.2
  Bottom 0.152: 21.03,84.42 21.34,84.72 OUT23.2 | 21.03,84.42 20.42,83.81 20.42,78.63 OUT21.4 20.38,77.07 19.98,76.66 19.98,72.52 20.49,72.02 20.49,71.09 20.38,70.99 20.38,70.54 O22.4 | 21.03,84.42 OUT23.2 | J30.2 28.19,86.4 23.17,86.4 21.49,84.72 OUT23.2
N$31
  Bottom 0.152: OUT28.2 69.19,78.47 72.09,78.47 75.9,74.66 75.9,72.84 72.09,69.03 71.17,69.03 O27.2 71.02,68.87 70.1,68.87 69.04,67.81 65.53,67.81 61.34,72 61.34,74.7 61.91,75.28 J26.2 60.33,76.95 59.06,78.22 59.06,80.13 59.11,80.18 54.56,84.72 OUT27.4 54.56,84.87 54.56,86.7 54.71,86.86 54.71,90.82 54.25,91.28 54.25,92.8 53.04,94.02 O26.4
N$32
  Bottom 0.152: O28.2 65.99,94.02 64.77,94.02 61.27,90.51 61.27,87.16 61.87,86.55 J27.2 62.03,86.4 64.47,86.4 67.06,83.81 | 67.06,83.81 OUT28.4 68.17,77.5 71.21,77.5 71.76,76.95 71.76,75.12 69.8,73.17 69.8,71.16 68.58,69.94 O27.4 | 67.06,83.81 67.97,84.72 OUT29.2
N$33
  Bottom 0.152: 24.08,69.33 24.38,69.03 O22.2 24.08,69.33 | 24.08,69.33 23.32,70.09 22.57,70.09 22.23,70.43 21.44,70.43 20.79,71.09 20.79,72.67 20.28,73.18 20.28,76.54 20.94,77.19 20.99,77.19 OUT21.2 | 14.33,76.95 12.65,76.95 9.91,74.21 7.32,74.21 3.51,78.02 3.51,79.08 INP2.2 | 24.08,69.33 22.56,67.81 18.9,67.81 14.33,72.38 14.33,76.95 | INP_2.2 13.36,80.76 15.88,80.76 16.19,80.44 16.19,77.27 15.88,76.95 14.33,76.95
N$34
  Top 0.152: J22.2 35.81,76.95 | 35.81,76.95 35.97,76.95 37.49,78.47 37.95,78.47 OUT24.2 | 35.81,76.95 35.81,75.58 38.71,72.68 38.71,71.16 39.93,69.94 39.93,69.03 O23.2
  Bottom 0.152: O21.4 21.95,94.17 22.86,94.17 23.93,95.24 29.21,95.24 29.21,87.17 29.57,86.82 29.57,85.18 | 29.57,85.18 27.74,85.18 27.43,84.87 23.47,84.87 OUT23.4 | 29.57,85.18 29.57,78.17 30.79,76.95 J22.2
N$47
  Top 0.152: O4.2 33.02,28.58 29.85,25.4 29.85,21.91 J4.2 32.46,19.29 OUT4.2
  Bottom 0.152: OUT4.2 36.88,19.2 36.88,14.02 36.87,14.02 OUT3.4 35.94,13.08 36.41,13.08 37.82,11.67 39.97,11.67 40.11,11.54 40.11,9.57 38.58,8.05 38.58,5.57 37.47,4.45 O3.4
N$50
  Top 0.152: OUT4.4 37.57,20.71 32.71,20.71 30.22,23.2 30.22,25.06 32.47,27.3 36.2,27.3 O4.4
  Bottom 0.152: OUT4.4 39.01,19.2 39.01,13.63 40.41,12.24 40.41,10.79 | 55.51,3.41 55.47,3.35 54.56,3.35 53.49,2.29 41.28,2.29 41.12,2.44 41.12,3.96 40.16,4.91 39.54,4.91 38.89,5.57 38.89,6.5 38.91,6.52 38.91,7.95 40.41,9.45 40.41,10.79 | 55.51,3.41 O5.2 | OUT5.2 55.49,13.09 58.08,10.5 58.95,10.5 60.26,9.18 60.26,7.33 58.95,6.01 58.11,6.01 55.51,3.41 | J5.2 45.72,10.79 40.41,10.79
N$51
  Bottom 0.152: O6.2 50.44,28.5 49.07,28.5 45.72,25.15 45.72,21.64 46.33,21.03 J6.2 46.48,20.88 48.92,20.88 51.51,18.29 | 51.51,18.29 51.51,13.11 OUT5.4 51.36,12.95 52.64,11.67 55.53,11.67 55.88,11.32 55.88,9.28 54.45,7.85 54.45,4.91 O5.4 | 51.51,18.29 52.43,19.2 OUT6.2
N$56
  Top 0.152: 10.48,18.14 11.28,18.14 11.89,17.53 13.11,17.53 INP_.4 | 10.48,18.14 7.93,18.14 7.28,17.49 7.25,17.51 4.71,17.51 3.51,16.31 INP6.4 | J7.1 61.87,14.02 61.42,14.02 60.5,14.94 47.7,14.94 46.79,14.02 46.48,14.02 J5.1 46.33,14.02 45.87,14.48 30.79,14.48 | J2.1 29.38,19.54 | 29.38,19.54 29.43,19.58 29.43,21.44 29.21,21.65 29.21,25 26.9,27.3 23.29,27.3 23.03,27.57 23.03,29.04 22.32,29.74 10.22,29.74 9.69,29.21 9.69,25.64 9.53,25.47 9.53,22.92 10.57,21.87 10.57,20.01 10.48,19.91 10.48,18.14 | 30.79,14.48 30.79,14.02 J3.1 30.79,14.48 | 29.38,19.54 30.48,18.44 30.79,18.44 J4.1
  Bottom 0.152: J5.1 46.48,14.02 46.48,18.29 J6.1 | J7.1 62.03,14.02 62.03,18.29 J8.1 61.87,18.44 61.87,19.2 60.66,20.42 60.66,21.59 60.96,21.89 60.96,25.12 61.09,25.25 61.09,25.27 65.53,29.72 69.04,29.72 69.95,28.8 69.95,28.04 70.71,27.28 73.76,27.28 76.2,24.84 | OUT10.4 85.8,19.35 85.8,22.4 85.5,22.71 85.5,26.37 84.28,27.58 84.28,28.5 O10.4 84.13,28.65 83.06,29.72 81.08,29.72 76.2,24.84 | 76.2,24.84 76.2,20.42 77.42,19.2 77.42,18.47 J10.1 J9.1 | J3.1 J4.1
N$57
  Top 0.152: O9.2 85.41,4.76 83.19,4.76 82.87,5.08 82.87,8.57 81.28,10.16 81.28,11.43 | 81.28,11.43 J9.2 | OUT9.2 84.53,13.09 82.87,11.43 81.28,11.43
  Bottom 0.152: O8.4 68.58,27.74 69.95,26.37 69.95,22.56 70.26,22.25 70.26,19.51 70.1,19.35 OUT8.4 70.1,17.53 76.2,11.43 J9.2
POWER1
  Top 1.27: X4.2 94.78,63.37 92.08,63.37 | 24.45,63.37 9.53,63.37 8.83,62.67 8.83,58.75 3.49,53.42 INP1.6 1.65,49.65 1.65,43.43 3.18,41.9 6.07,41.9 8.83,39.15 8.83,38.4 10.55,36.67 13.09,36.67 13.51,36.25 O12.6 19.37,35.36 20.32,34.41 34.93,34.41 | 24.45,63.37 40.01,63.37 | 40.01,63.37 55.56,63.37 | 55.56,63.37 71.12,63.37 | 71.12,63.37 86.68,63.37 | 86.68,63.37 92.08,63.37 | O20.6 86.68,63.37 | O18.6 71.12,63.37 | O16.6 55.56,63.37 | O11.6 24.45,63.37 | 92.08,63.37 92.08,54.35 89.54,51.81 89.54,46.1 92.08,43.55 92.08,36.57 89.92,34.41 81.6,34.41 | 81.6,34.41 66.04,34.41 | 66.04,34.41 50.48,34.41 | 50.48,34.41 34.93,34.41 | O15.6 50.48,34.41 | O17.6 66.04,34.41 | O19.6 81.6,34.41 | O14.6 40.01,63.37 | O13.6 34.93,34.41
  Bottom 0.508: J19.2 3.49,54.16
  Bottom 1.27: 3.49,54.16 INP1.6
POWER2
  Top 1.27: X1.2 94.78,30.61 92.08,30.61 | 24.45,30.61 9.53,30.61 8.83,29.91 8.83,25.99 3.49,20.66 INP6.6 1.65,16.89 1.65,10.67 3.18,9.14 6.07,9.14 8.83,6.39 8.83,5.64 10.55,3.91 13.09,3.91 13.51,3.49 O1.6 19.37,2.6 20.32,1.65 34.93,1.65 | 24.45,30.61 40.01,30.61 | 40.01,30.61 55.56,30.61 | 55.56,30.61 71.12,30.61 | 71.12,30.61 86.68,30.61 | 86.68,30.61 92.08,30.61 | O10.6 86.68,30.61 | O8.6 71.12,30.61 | O6.6 55.56,30.61 | O2.6 24.45,30.61 | 92.08,30.61 92.08,21.59 89.54,19.05 89.54,13.33 92.08,10.79 92.08,3.81 89.92,1.65 81.6,1.65 | 81.6,1.65 66.04,1.65 | 66.04,1.65 50.48,1.65 | 50.48,1.65 34.93,1.65 | O5.6 50.48,1.65 | O7.6 66.04,1.65 | O9.6 81.6,1.65 | O4.6 40.01,30.61 | O3.6 34.93,1.65
  Bottom 0.508: J1.2 3.49,21.4
  Bottom 1.27: 3.49,21.4 INP6.6
POWER3
  Top 1.27: X6.2 94.78,96.13 92.08,96.13 | 24.45,96.13 9.53,96.13 8.83,95.43 8.83,91.51 3.49,86.18 INP2.6 1.65,82.41 1.65,76.19 3.18,74.66 6.07,74.66 8.83,71.91 8.83,71.16 10.55,69.43 13.09,69.43 13.51,69.01 O22.6 19.37,68.12 20.32,67.17 34.93,67.17 | 24.45,96.13 40.01,96.13 | 40.01,96.13 55.56,96.13 | 55.56,96.13 71.12,96.13 | 71.12,96.13 86.68,96.13 | 86.68,96.13 92.08,96.13 | O30.6 86.68,96.13 | O28.6 71.12,96.13 | O26.6 55.56,96.13 | O21.6 24.45,96.13 | 92.08,96.13 92.08,87.11 89.54,84.57 89.54,78.85 92.08,76.32 92.08,69.33 89.92,67.17 81.6,67.17 | 81.6,67.17 66.04,67.17 | 66.04,67.17 50.48,67.17 | 50.48,67.17 34.93,67.17 | O25.6 50.48,67.17 | O27.6 66.04,67.17 | O29.6 81.6,67.17 | O24.6 40.01,96.13 | O23.6 34.93,67.17
  Bottom 0.508: J29.2 3.49,86.93
  Bottom 1.27: 3.49,86.93 INP2.6

## Text on the board
Top: Top | Top | Top
Bottom: Bottom | Bottom | Bottom
tPlace: Inp. | Opt- | RGB LED Verteiler Universal | MobaLedLib | by Hardi 01.03.19 | 5V | + | Inp. | Opt- | RGB LED Verteiler Universal | MobaLedLib | by Hardi 01.03.19 | 5V | + | Inp. | Opt- | RGB LED Verteiler Universal | MobaLedLib | by Hardi 01.03.19 | 5V | +
tNames: Out2 | Out4 | Out6 | Out8 | Out10 | + | Inp | O2 | O4 | O6 | O8 | O10 | J6 | J8 | J10 | J4 | J2 | J3 | 0.1uF | O1 | O3 | J5 | O5 | J7 | O7 | J9 | O9 | + | Out1 | Out3 | Out5 | Out7 | Out9 | Out2 | Out4 | Out6 | Out8 | Out10 | + | Inp | O2 | O4 | O6 | O8 | O10 | J6 | J8 | J10 | J4 | J2 | J3 | 0.1uF | O1 | O3 | J5 | O5 | J7 | O7 | J9 | O9 | + | Out1 | Out3 | Out5 | Out7 | Out9 | Out2 | Out4 | Out6 | Out8 | Out10 | + | Inp | O2 | O4 | O6 | O8 | O10 | J6 | J8 | J10 | J4 | J3 | 0.1uF | J2 | O1 | O3 | J5 | O5 | J7 | O7 | J9 | O9 | + | Out1 | Out3 | Out5 | Out7 | Out9
_tNames: C8 | INP_ | C8 | INP_ | C8 | INP_
_bNames: OUT2 | OUT4 | OUT6 | OUT8 | OUT10 | J1 | O2 | O4 | O6 | O8 | O10 | J6 | J8 | J10 | J4 | J2 | J3 | J5 | J7 | J9 | O1 | O3 | O5 | O7 | O9 | J_POWER | OUT7 | OUT9 | OUT1 | OUT3 | OUT5 | OUT2 | OUT4 | OUT6 | OUT8 | OUT10 | J1 | O8 | O2 | O4 | O6 | O10 | J6 | J8 | J10 | J4 | J3 | J2 | O1 | O3 | J5 | J7 | J9 | O5 | O7 | O9 | J_POWER | OUT1 | OUT3 | OUT5 | OUT7 | OUT9 | OUT2 | OUT4 | OUT6 | OUT8 | OUT10 | J1 | O2 | O4 | O8 | O10 | O6 | J6 | J8 | J10 | J4 | J3 | J2 | O1 | O3 | J5 | O5 | J7 | O7 | J9 | O9 | J_POWER | OUT1 | OUT3 | OUT5 | OUT7 | OUT9